# Altium PCB PCB Test.PcbDoc
Units mm, origin at the board's own origin, x right, y up, seen from the top; angles counter-clockwise.
Board outline 152.4 x 101.6 mm, 2 copper layers (Top Layer, Bottom Layer); 28 components, 33 nets, 100 pads, 0 vias.
Unrouted connection lines stored in the file: 66.
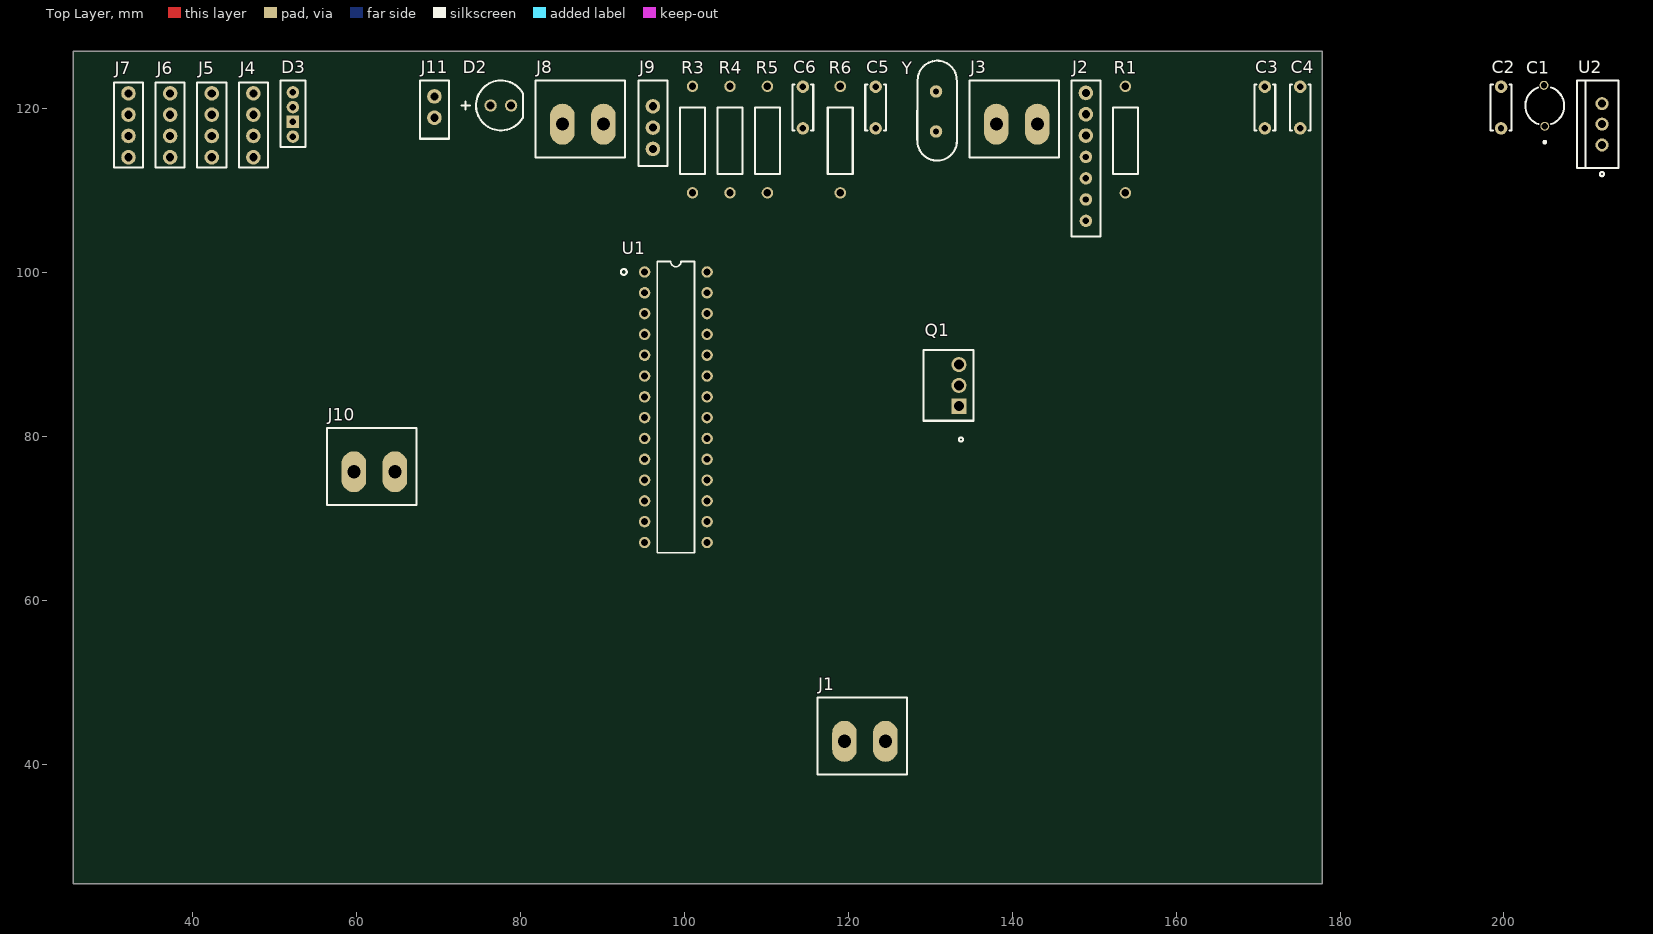
[diagram p0: Top Layer view]
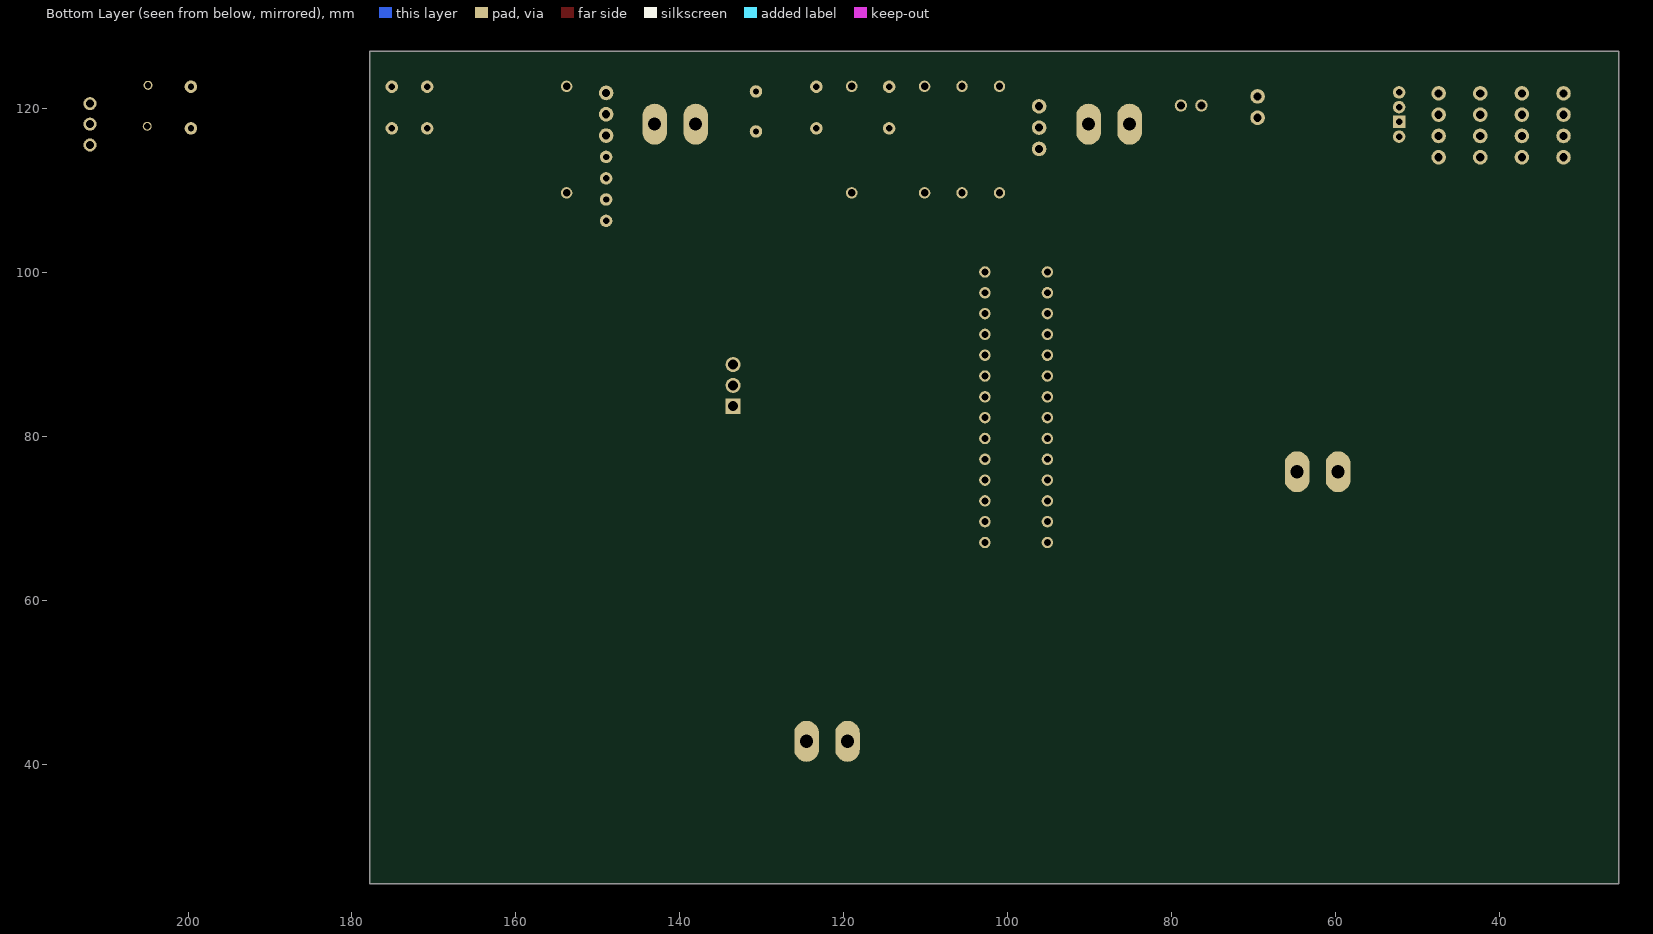
[diagram p1: Bottom Layer view, seen from below]

## Layer stack, top to bottom
Top Solder: solder mask 0.0102, Solder Resist, Dk 3.5
Top Layer: signal copper 0.0356
Dielectric 1: dielectric 0.32, FR-4, Dk 4.8
Bottom Layer: signal copper 0.0356
Bottom Solder: solder mask 0.0102, Solder Resist, Dk 3.5

## Board outline
25.4,25.4 177.8,25.4 177.8,127 25.4,127

## Design rules (kind name [scope] priority, off if disabled: settings)
Clearance [All] p1: gap=0.254 ignorepadtopadclearanceinfootprint=FALSE
PolygonConnect [All] p1: connectstyle=Relief reliefconductorwidth=0.254 reliefentries=4 polygonreliefangle="90 Angle" airgapwidth=0.254
RoutingVias [All] p1: holewidth=0.711 width=1.27 viastyle="Through Hole" minholewidth=0.711 minwidth=1.27 maxholewidth=0.711 maxwidth=1.27
SolderMaskExpansion [All] p1: expansion=0.102 istentingtop=FALSE
SupplyNets "Schematic Supply Nets_4" [InNet('Vin')] p1: voltage=0.000
SupplyNets "Schematic Supply Nets_3" [InNet('VCC')] p2: voltage=0.000
SupplyNets "Schematic Supply Nets_2" [InNet('GND')] p3: voltage=0.000
SupplyNets "Schematic Supply Nets_1" [InNet('+5V')] p4: voltage=0.000
SupplyNets "Schematic Supply Nets" [InNet('+5')] p5: voltage=0.000
Width [All] p1: maxlimit=0.254 minlimit=0.254 preferedwidth=0.254
30 further rules are at their usual default settings.

## Components (designator, comment, footprint, x,y, rotation, side; value= is the part's Value field where it differs from the comment)
C1 "CAP 10uF" "Cap 10uF" 204.978,117.856 r90 top
C2 "CAP 100nF" "Cap 100nF" 199.644,122.682 r90 top
C3 "CAP 100nF" "Cap 100nF" 170.815,122.682 r90 top
C4 "CAP 100nF" "Cap 100nF" 175.133,122.682 r90 top
C5 "CAP 22pF" "Cap 22pF" 123.317,117.602 r90 top
C6 "CAP 22pF" "Cap 22pF" 114.427,117.602 r90 top
D2 "LED" LED 76.327,120.396 r0 top
D3 "RGB LED" "RGB LED" 52.197,116.586 r90 top
J1 "INPUT POWER" "Terminal Block 2pin" 120.269,33.655 r0 top
J2 "Header 7pins" "Header 7pins" 149.225,94.996 r90 top
J3 "MOTOR power" "Terminal Block 2pin" 138.811,108.966 r0 top
J4 "UltraSonic 1" "Header 4pin" 47.371,114.046 r90 top
J5 "UtraSonic 2" "Header 4pin" 42.291,114.046 r90 top
J6 "Bluetooth Module" "Header 4pin" 37.211,114.046 r90 top
J7 "Arduino as ISP" "Header 4pin" 32.131,114.046 r90 top
J8 "Measured Current" "Terminal Block 2pin" 85.852,108.966 r0 top
J9 "Current sensor" "Headers 3pins" 99.695,122.174 r90 top
J10 "Measured Voltage" "Terminal Block 2pin" 60.405,66.548 r0 top
J11 "Voltage sensor" "Header 2pins" 98.171,123.19 r90 top
Q1 "IRF5305 P-MOSFET" IRF5305 133.604,83.693 r90 top
R1 "RES 100K" Res100K 153.797,109.728 r90 top
R3 "RES 1K" "Res 1K" 100.965,109.728 r90 top
R4 "RES 1K" "Res 1K" 105.537,109.728 r90 top
R5 "RES 1K" "Res 1K" 110.109,109.728 r90 top
R6 "RES 1K" "Res 1K" 118.999,109.728 r90 top
U1 "Atmega328p" "ATMega 328 P-PU - duplicate" 95.123,67.056 r0 top
U2 "LM7805" LM7805 211.963,115.57 r90 top
Y "Crystal oscillator" "Crrystal 16MHZ" 130.683,117.221 r90 top

## Footprints (in the part's own frame and the unit in brackets; to place one, negate y for a bottom-side part, rotate by r counter-clockwise, add the part's x,y. Pads: shape width x height; smd on the part's side, far side on the other; paste and mask are expansions set on the pad)
"ATMega 328 P-PU - duplicate" [mm]
  round 1.4 hole 0.85: 1(0,33.02) 2(0,30.48) 3(0,27.94) 4(0,25.4) 5(0,22.86) 6(0,20.32) 7(0,17.78) 8(0,15.24) 9(0,12.7) 10(0,10.16) 11(0,7.62) 12(0,5.08) 13(0,2.54) 14(0,0) 15(7.62,0) 16(7.62,2.54) 17(7.62,5.08) 18(7.62,7.62) 19(7.62,10.16) 20(7.62,12.7) 21(7.62,15.24) 22(7.62,17.78) 23(7.62,20.32) 24(7.62,22.86) 25(7.62,25.4) 26(7.62,27.94) 27(7.62,30.48) 28(7.62,33.02)
  silkscreen extent -2.9,-1.27 6.09,34.29, body extent -0.14,-0.83 7.76,33.85, height 4.57
"Cap 10uF" [mm]
  round 1.1 hole 0.75: 1(0,0) 2(5,0.102)
  silkscreen extent -2.08,-2.37 4.75,2.37, body extent -0.21,-2.5 5.29,2.5, height 12.5
"Cap 22pF" [mil]
  round 60 hole 30: 1(0,0) 2(200,0)
  silkscreen extent -10,-50 210,50, body extent -11,-47 211,50, height 197
"Cap 100nF" [mil]
  round 60 hole 30: 1(-200,0) 2(0,0)
  silkscreen extent -210,-50 10,50, body extent -218,-40 18,39, height 433
"Crrystal 16MHZ" [mil]
  round 60 hole 28.74: 1(0,0) 2(192.13,0)
  silkscreen extent -140,-100 340,90, body extent -123,-92 323,92, height 256
"Header 2pins" [mil]
  round 70 hole 39.37: 1(-169,1130) 2(-66.64,1130)
  silkscreen extent -270,1060 10,1200, body extent -220,1105 -24,1155, height 290
"Header 4pin" [mil]
  round 70 hole 39.37: 1(1,0) 2(103.36,0) 3(205.72,0) 4(308.09,0)
  silkscreen extent -49,-70 361,70, body extent -49,-38 371,58, height 335
"Header 7pins" [mil]
  round 70 hole 39.37: 1(1060,10) 2(957.64,10) 3(855.28,10)
  round 60 hole 30: 4(752.91,10) 5(650,10) 6(548.19,10) 7(445.83,10)
  silkscreen extent 370,-60 1120,80, body extent 410,-40 1100,60, height 330
"Headers 3pins" [mil]
  round 70 hole 39.37: 1(-279,140) 2(-176.64,140) 3(-74.28,140)
  silkscreen extent -360,70 50,210, body extent -310,90 -10,190, height 330
IRF5305 [mm]
  rect 1.845x1.845 hole 1.23: 1(0,0.127)
  round 1.845 hole 1.23: 2(2.54,0.127) 3(5.08,0.127)
  silkscreen extent -4.32,-1.65 6.86,4.45, body extent -2.67,-1.27 7.75,3.18, height 19.3
LED [mm]
  round 1.5 hole 1: 1(0,0) 2(2.5,0)
  silkscreen extent -3.56,-3.05 3.95,3.05, body extent -1.66,-2.95 3.77,2.95, height 10.6
LM7805 [mm]
  round 1.6 hole 1: 1(0,0) 2(2.55,0) 3(5.05,0)
  silkscreen extent -3.81,-2.03 7.87,3.05, body extent -2.54,-1.84 7.62,2.86, height 19.81
Res100K [mm]
  round 1.4 hole 0.9: 1(0,0) 2(13,0)
  silkscreen extent 2.29,-1.52 10.41,1.52, body extent -0.2,-1.27 13.4,1.23, height 4.04
"Res 1K" [mm]
  round 1.4 hole 0.9: 1(0,0) 2(13,0)
  silkscreen extent 2.29,-1.52 10.41,1.52, body extent -0.2,-1.27 13.4,1.23, height 4.04
"RGB LED" [mil]
  round 60 hole 31.5: 1(0,0) 3(141.73,0) 4(212.6,0)
  rect 60x60 hole 31.5: 2(70.87,0)
  silkscreen extent -50,-60 270,60
"Terminal Block 2pin" [mm]
  oval 3x5 hole 1.6: 1(-0.762,9.144) 2(4.238,9.144)
  silkscreen extent -4.06,5.08 6.86,14.48, body extent -3.9,5.22 6.7,14.22, height 12.6

## Part data
C1: library part "CAP 10uF_1"
J1 J3 J8 J10: library part "TerminalBlock 2pin"
J4 J5 J6 J7: library part "Headers 4pin"
J9: library part "Header 3pins"
J11: library part "Headers 2pins"

## Nets (pads, with @x,y where several pads share a name; then routed paths per layer and width w, separated by ;. In a path a pad name is that pad's centre, name@x,y a point inside that pad or via, vN(x,y) a via of type N, cw(c..) or ccw(c..) an arc to the next point about the centre after c; other vN are vias at no path point)
+5: J2.7 J9.1
+5V: C1.1 C2.2 C4.2 J4.1 J5.1 J6.1 U1.7 U1.20 U2.2
BLUE: R3.2 U1.14
CUR_SIG: J9.2 U1.27
ECHO1: J4.2 U1.11
ECHO2: J5.3 U1.25
EN: J2.1 J2.2 U1.5
GND: C1.2 C2.1 C3.1 C4.1 C5.1 C6.1 D2.2 D3.1 J1.2 J3.2 J4.4 J5.4 J6.2 J8.2 J9.3 J10.2 J11.2 R1.1 U1.8 U1.22 U2.3
GREEN: R4.2 U1.13
IN1: J2.6 U1.26
IN2: J2.5 U1.15
IN3: J2.4 U1.4
IN4: J2.3 U1.6
LED_ind: R6.2 U1.23
MISO: J7.2 U1.18
MOSI: J7.1 U1.17
NetC5_2: C5.2 U1.9 Y.2
NetC6_2: C6.2 U1.10 Y.1
NetD2_1: D2.1 R6.1
NetD3_2: D3.2 R5.1
NetD3_3: D3.3 R4.1
NetD3_4: D3.4 R3.1
NetQ1_3: Q1.3 R1.2
RED: R5.2 U1.24
Reset: J7.4 U1.1
RX: J6.4 U1.2
SCK: J7.3 U1.19
TRIG1: J4.3 U1.12
TRIG2: J5.2 U1.16
TX: J6.3 U1.3
VCC: C3.2 J3.1 J8.1 J10.1 Q1.2 U2.1
Vin: J1.1 Q1.1
VOLT_SIG: J11.1 U1.28
pads on no net: U1.21